# Altium PCB CH641P-R0-1v0.PcbDoc
Units mil, origin at the board's own origin, x right, y up, seen from the top; angles counter-clockwise.
Board outline 1309.24 x 1191.13 mil, 2 copper layers (Top Layer, Bottom Layer); 34 components, 26 nets, 103 pads, 190 vias.
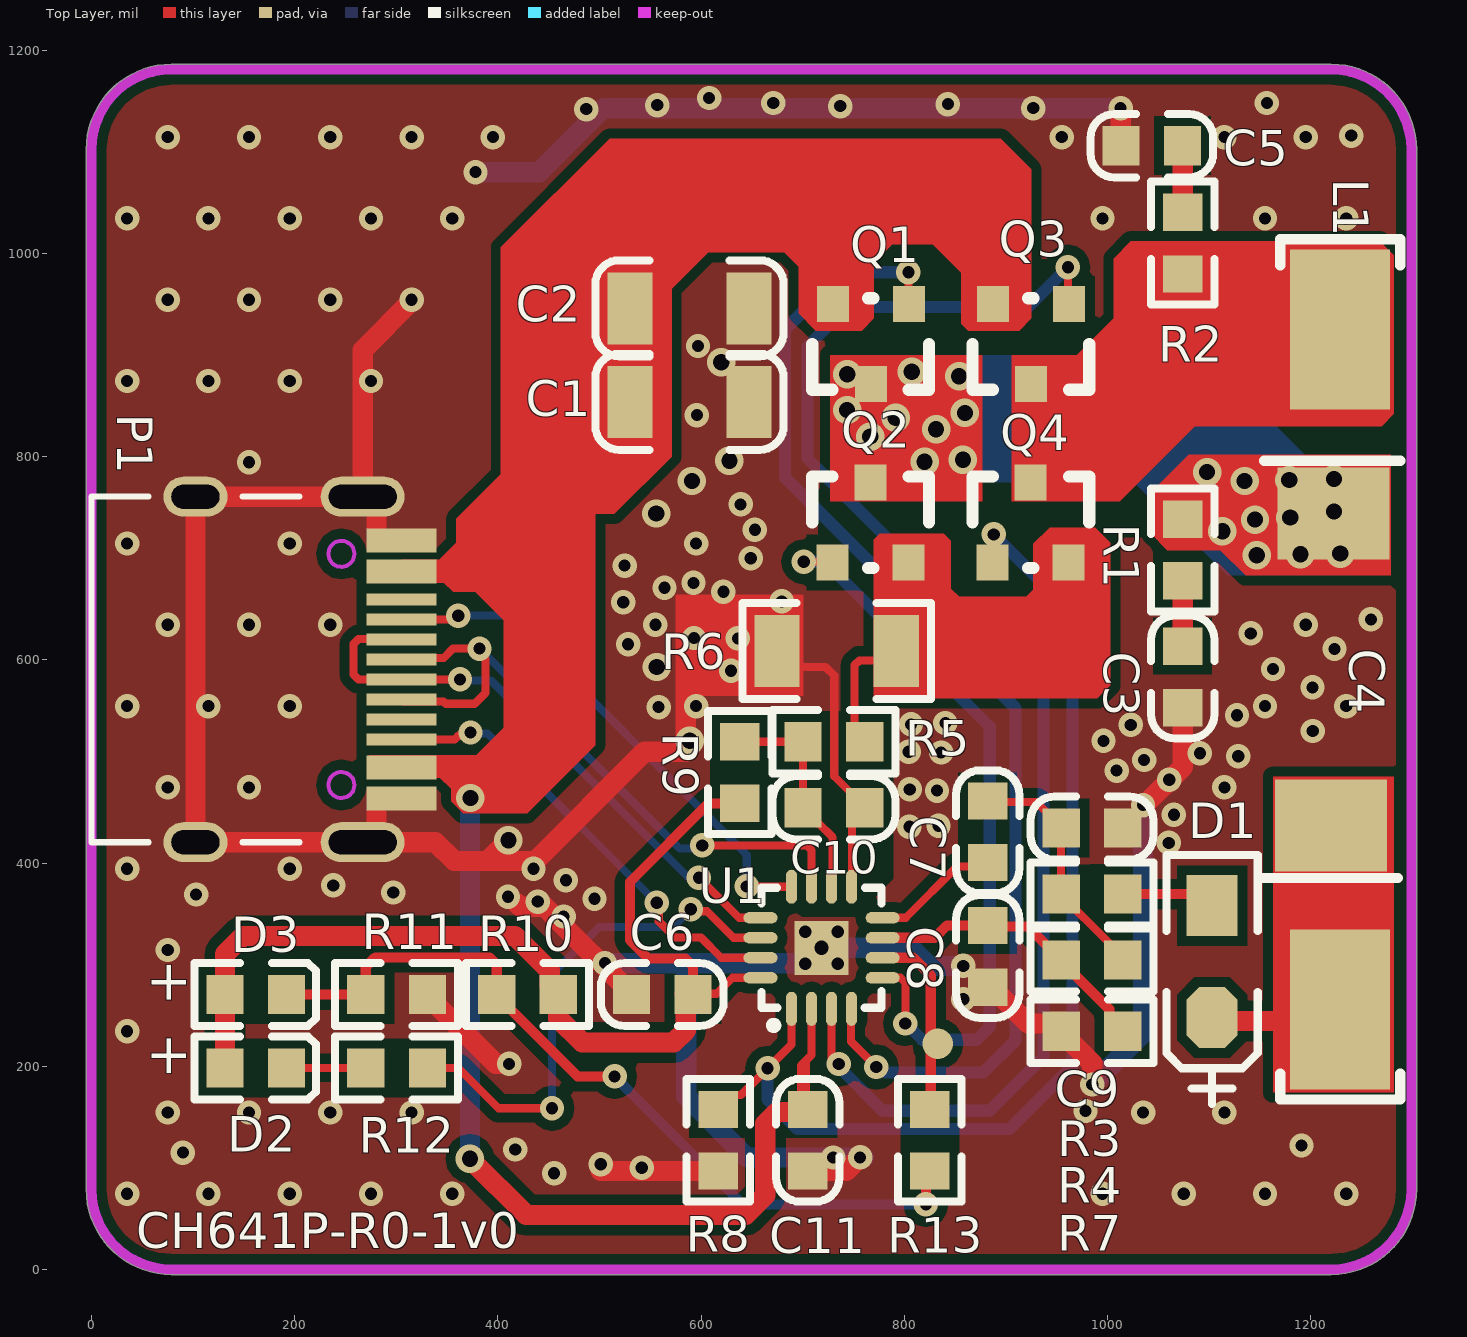
[diagram p0: Top Layer view]
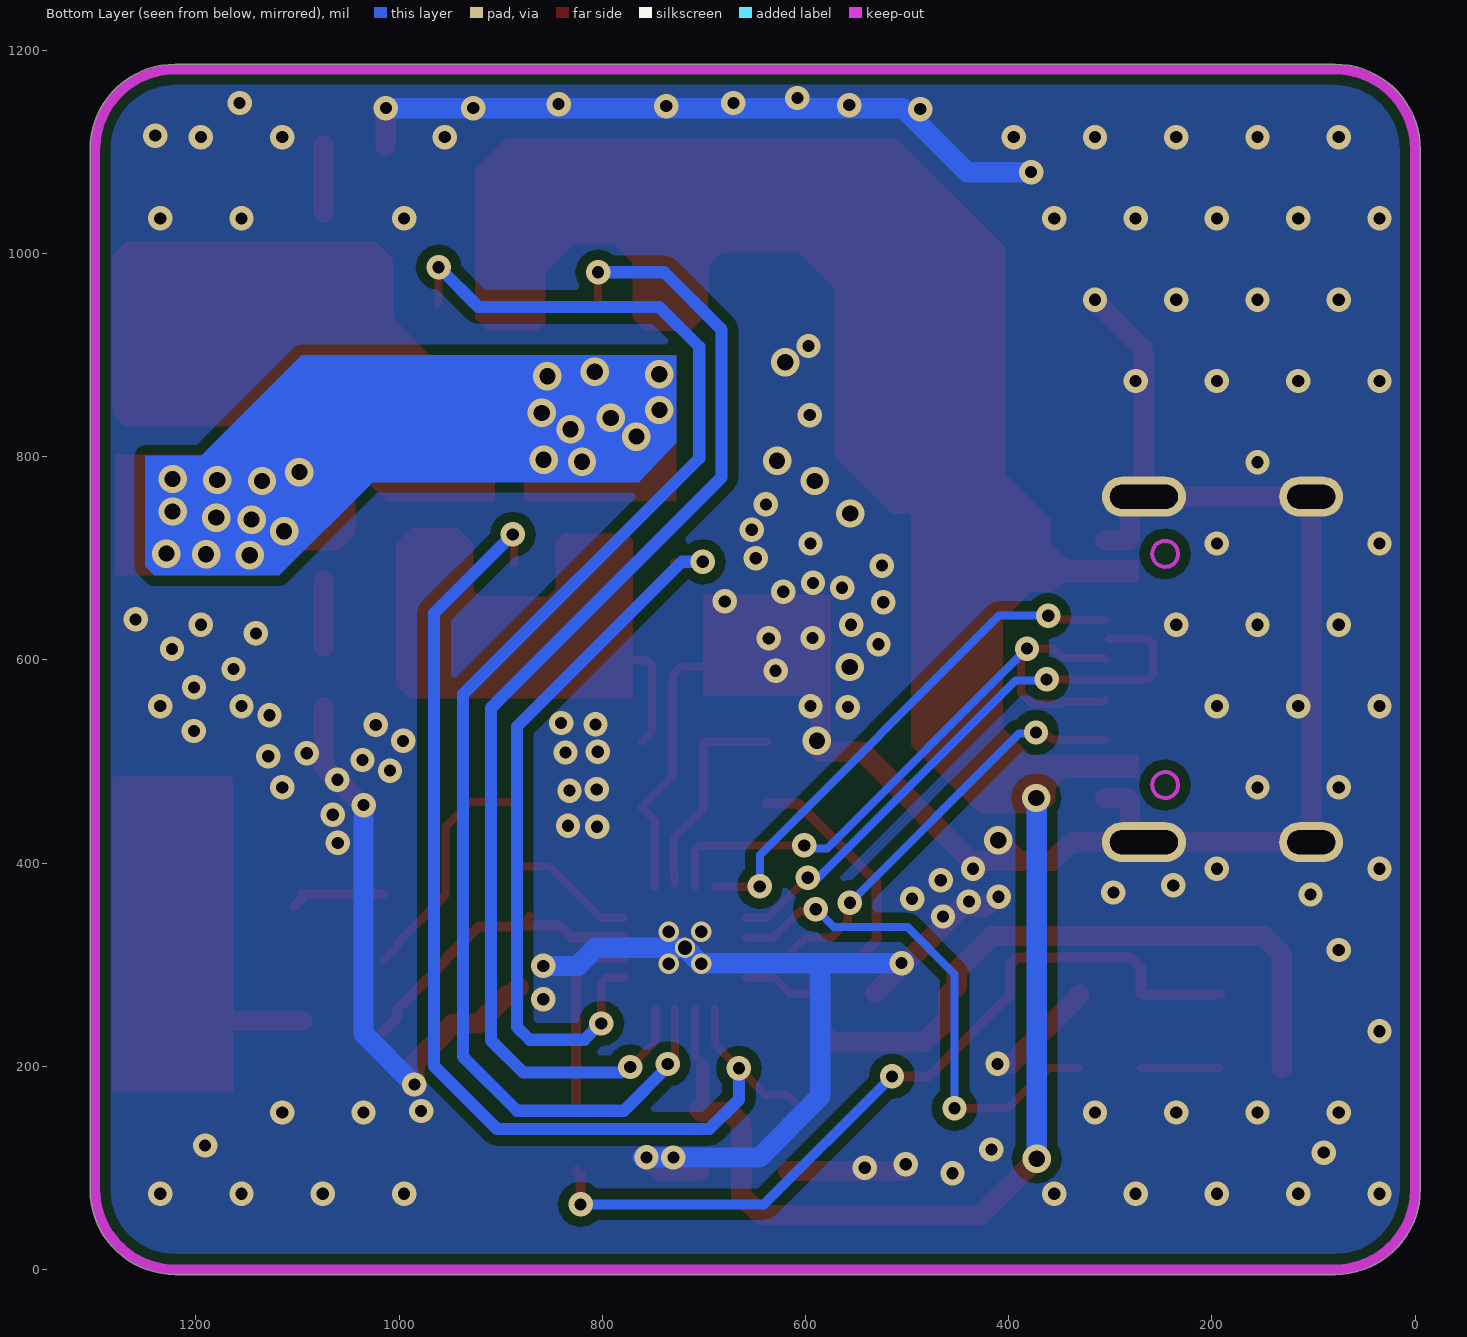
[diagram p1: Bottom Layer view, seen from below]

## Layer stack, top to bottom
Top Solder: solder mask 0.4, Solder Resist, Dk 3.5
Top Layer: signal copper 1.4
Dielectric1: dielectric 12.6, FR-4, Dk 4.8
Bottom Layer: signal copper 1.4
Bottom Solder: solder mask 0.4, Solder Resist, Dk 3.5

## Board outline
-5.02,78.74 cw(c0,78.74) -4.98,79.37 cw(c0,80) -5.02,80 -5.02,1102.36 cw(c78.74,1102.36) 78.74,1186.12 1220.47,1186.12 cw(c1220.47,1102.36) 1304.23,1102.36 cw(c1299.21,1102.36) 1304.23,1102.32 1304.23,78.74 cw(c1220.47,78.74) 1220.47,-5.01 80,-5.01 cw(c80,0) 79.37,-4.98 cw(c78.74,0) 78.74,-5.01 cw(c78.74,78.74)

## Design rules (kind name [scope] priority, off if disabled: settings)
Clearance Clearance_1 [InPolygon] p1: gap=10 ignorepadtopadclearanceinfootprint=FALSE except(0: Arc-Hole Track-Hole SMDPad-Hole THPad-Hole Via-Hole Fill-Hole Poly-Hole Region-Hole Text-Hole)
Clearance [All] p2: gap=6 ignorepadtopadclearanceinfootprint=FALSE except(0: Arc-Hole Track-Hole SMDPad-Hole THPad-Hole Via-Hole Fill-Hole Poly-Hole Region-Hole Text-Hole)
ComponentClearance [All] p1 off: gap=10 collisioncheckmode=3 verticalgap=10 showdistances=FALSE
DiffPairsRouting [All] p1: maxlimit=10 minlimit=7 mostfreqgap=8 toplayer_minwidth=15 toplayer_maxwidth=15 toplayer_prefwidth=15 bottomlayer_minwidth=15 bottomlayer_maxwidth=15 bottomlayer_prefwidth=15 maxuncoupledlength=500
MinimumSolderMaskSliver [All] p1 off: minsoldermaskwidth=10
PolygonConnect [All] p1: connectstyle=Direct reliefconductorwidth=20 reliefentries=4 polygonreliefangle="90 Angle" airgapwidth=10
RoutingVias [All] p1: holewidth=16 width=28 viastyle="Through Hole" minholewidth=12 minwidth=24 maxholewidth=28 maxwidth=50
SilkToSilkClearance [All] p1 off: silktosilkclearance=10
SilkToSolderMaskClearance [IsPad] p1 off: minsilkscreentomaskgap=10 clearancetoexposedcopper=TRUE
SolderMaskExpansion [All] p1: expansion=2 istentingtop=FALSE
Width [All] p1: maxlimit=100 minlimit=6 preferedwidth=10
25 further rules are at their usual default settings.

## Components (designator, comment, footprint, x,y, rotation, side; value= is the part's Value field where it differs from the comment)
C1 "22uF" 1206_C 530,854 r0 top
C2 "22uF" 1206_C 530,946 r0 top
C3 "10nF" 0603_C 1074.12,552.82 r90 top
C4 "400nF CBB 100V" SMD2-2.3x2.8_P7.8mm 1221.27,590.55 r0 top
C5 "10nF" 0603_C 1074,1106 r180 top
C6 "2.2uF" 0603_C 592.13,270.58 r180 top
C7 "3.3nF" 0603_C 882.12,400.45 r90 top
C8 "10nF" 0603_C 882.12,338.45 r270 top
C9 "15nF" 0603_C 954.49,434.45 r0 top
C10 "1uF" 0603_C 700.49,454.45 r0 top
C11 "1uF" 0603_C 705.12,157.45 r270 top
D1 "1N4148" 1206+ 1103,248 r90 top
D2 "LED_R" 0603+ 131.43,198.35 r0 top
D3 "LED_B" 0603+ 131.43,270.58 r0 top
L1 "Coil" SMD2-4x2.5_P17mm 1229.14,925.2 r180 top
P1 "TYPE-C-Receptacle-2.0" TYPE-C-Receptacle-2.0 305.12,590.55 r270 top
Q1 "PMOS 3407" SOT-23 767.1,911.05 r180 top
Q2 "NMOS 3404/3400A" SOT-23 766.9,735.08 r0 top
Q3 "PMOS 3407" SOT-23 924.69,911.05 r180 top
Q4 "NMOS 3404/3400A" SOT-23 924.5,735.08 r0 top
R1 "2R" 0603 1074.12,738.45 r270 top
R2 "2R" 0603 1074.12,1040.43 r270 top
R3 "3K3" 0603 954.49,369.45 r0 top
R4 "33K" 0603 954.49,304.45 r0 top
R5 "1K" 0603 700.49,519.45 r0 top
R6 "0.01R" 1206 674.86,608.45 r0 top
R7 "3K3" 0603 954.49,234.45 r0 top
R8 "NC.(51K)" 0603 617.01,157.45 r270 top
R9 "470K" 0603 638.1,458.75 r90 top
R10 "8K2" 0603 459.51,270.58 r180 top
R11 "NTC104" 0603 330.68,270.58 r180 top
R12 "1K" 0603 270.06,198.35 r0 top
R13 "1K" 0603 825.18,157.45 r270 top
U1 "CH641P" QFN16_3X3 718.62,316.58 r0 top

## Footprints (in the part's own frame and the unit in brackets; to place one, negate y for a bottom-side part, rotate by r counter-clockwise, add the part's x,y. Pads: shape width x height; smd on the part's side, far side on the other; paste and mask are expansions set on the pad)
0603 [mm]
  rect 0.93x0.98 smd: 1(0,0) 2(1.54,0)
  silkscreen extent -0.76,-0.79 2.3,0.79
0603+ [mm]
  rect 0.93x0.98 smd: 1(0,0) 2(1.54,0)
  silkscreen extent -0.76,-0.79 2.27,0.79
0603_C [mm]
  rect 0.93x0.98 smd mask+0.051: 1(0,0) 2(1.54,0)
  silkscreen extent -0.76,-0.79 2.31,0.79
1206 [mm]
  rect 1.13x1.8 smd: 1(0,0) 2(2.98,0)
  silkscreen extent -0.87,-1.2 3.84,1.2
1206+ [mil]
  oct 60x50 smd: 1(0,0)
  rect 60x50 smd: 2(110,0)
  silkscreen extent -85,-45 160,45
1206_C [mm]
  rect 1.13x1.8 smd mask+0.051: 1(0,0) 2(2.98,0)
  silkscreen extent -0.87,-1.2 3.84,1.2
QFN16_3X3 [mm]
  rect 1.35x1.35 smd mask+0.051: 0(0,0)
  round 0.508 hole 0.356: 0(0,0)
  oval 0.28x0.85 smd mask+0.051: 1(-0.75,-1.526) 2(-0.25,-1.526) 3(0.25,-1.526) 4(0.75,-1.526) 9(0.75,1.526) 10(0.25,1.526) 11(-0.25,1.526) 12(-0.75,1.526)
  oval 0.85x0.28 smd mask+0.051: 5(1.526,-0.75) 6(1.526,-0.25) 7(1.526,0.25) 8(1.526,0.75) 13(-1.526,0.75) 14(-1.526,0.25) 15(-1.526,-0.25) 16(-1.526,-0.75)
  silkscreen extent -1.5,-2.02 1.5,1.5, body extent -1.52,-1.52 1.52,1.52, height 0.25
SMD2-2.3x2.8_P7.8mm [mm]
  rect 2.8x2.3 smd: 1(0.029,3.9) 2(-0.029,-3.9)
  silkscreen extent -1.76,-5.22 1.7,5.22
SMD2-4x2.5_P17mm [mm]
  rect 2.5x4 smd: 1(0,0) 2(0,17)
  silkscreen extent -1.5,-2.25 1.5,19.25
SOT-23 [mm]
  rect 0.8x0.9 smd: 1(-0.95,-1) 2(0.95,-1) 3(0,1)
  silkscreen extent -1.46,-1.14 1.46,1.15
TYPE-C-Receptacle-2.0 [mm]
  oval 1x2.1 hole 0.6 slot 1.7 at 90 deg: 0(-4.32,-0.97) 0(4.32,-0.97)
  oval 1x1.6 hole 0.6 slot 1.2 at 90 deg: 0(-4.32,-5.15) 0(4.32,-5.15)
  rect 0.6x1.75 smd mask+0.051: A1(-3.225,0) A4(-2.45,0) B1(3.225,0) B4(2.45,0)
  rect 0.3x1.75 smd mask+0.051: A5(-1.25,0) A6(-0.25,0) A7(0.25,0) A8(1.25,0) B5(1.75,0) B6(0.75,0) B7(-0.75,0) B8(-1.75,0)
  Keep-Out Layer circle w0.1: c2.89,-1.5 r0.325
  Keep-Out Layer circle w0.1: c-2.89,-1.5 r0.325
  silkscreen extent -4.32,-7.75 4.32,-2.55

## Part data
C1 C2 C3 C4 C5 C6 C7 C8 C9 C10 C11: library part CAP, "Capacitor"
D1: library part DIODE, "Diode"
D2 D3: library part LED, "LED"
L1: library part INDUCTOR
P1: "Type-C USB2.0 母座"
Q1 Q3: library part PMOS, "P-MOSFET"
Q2 Q4: library part NMOS, "N-MOSFET"
R1 R2 R3 R4 R5 R6 R7 R8 R9 R10 R11 R12 R13: library part R
U1: "RISC-V MCU with PD/ADC/UART/OA, for wireless charging"

## Free pads (board coordinates)
  round 30 smd mask+2: ""(833.08,222.12)

## Via types
v1: diameter 24, hole 12, Top Layer to Bottom Layer, tented both sides, 156 vias
v2: diameter 28, hole 16, Top Layer to Bottom Layer, tented both sides, 30 vias
v3: diameter 20, hole 12, Top Layer to Bottom Layer, tented both sides, 4 vias

## Nets (pads, with @x,y where several pads share a name; then routed paths per layer and width w, separated by ;. In a path a pad name is that pad's centre, name@x,y a point inside that pad or via, vN(x,y) a via of type N, cw(c..) or ccw(c..) an arc to the next point about the centre after c; other vN are vias at no path point)
CC1: P1.A5 U1.12 | length 514.8
  Top Layer w8: P1.A5 357.43,639.76 v1(361.12,643.45) ; v1(645,377) 644.67,376.67 U1.12
  Bottom Layer w8: v1(361.12,643.45) 409.49,643.45 645,407.94 v1(645,377)
CC2: P1.B5 U1.15 | length 456.4
  Top Layer w8: P1.B5 357.64,521.65 361.37,525.39 v1@373.18,525.39 ; v1(556.38,360.92) 558.45,358.84 558.45,342.62 574.46,326.61 600.05,326.61 619.91,306.74 U1.15
  Bottom Layer w8: v1(373.12,528.45) 374.23,527.34 389.95,527.34 v1(556.38,360.92)
CH1N: Q4.1 R8.1 U1.1 | length 1090.1
  Top Layer w8: R8.1@610.72,164.7 617.77,171.76 639.38,171.76 v1(665.56,197.94) ; v1@664.6,198.89 667.31,201.61 v1@669.23,201.61 ; v1@668.64,202.19 v1@669.23,201.61 ; U1.1 689.09,221.47 v1@669.23,201.61 ; Q4.1 887.1,722.43 v1(888.12,723.45)
  Bottom Layer w12: v1(665.56,197.94) 665.56,167.38 694.67,138.27 903.61,138.27 965.65,200.31 965.65,645.91 v1(888.12,723.45)
CH1P: Q3.1 U1.3 | length 1422.2
  Top Layer w8: U1.3 728.46,208.22 734.52,202.17 v1(735.53,202.17) ; v1(961.12,986.45) 961.12,951.4 Q3.1
  Bottom Layer w12: v1(735.53,202.17) 735.53,199.43 778.7,156.27 883.86,156.27 937.02,209.43 937.02,566.1 704.67,798.45 704.67,908.06 743.93,947.32 921.99,947.32 v1(961.12,986.45)
CH2N: Q2.1 U1.5 | length 733.9
  Top Layer w8: v1(701.12,696.45) 728.76,696.45 Q2.1 ; U1.5 796.4,287.06 801.08,282.37 v1(801.08,242.08)
  Bottom Layer w12: v1(701.12,696.45) 721.73,696.45 884.13,534.05 884.13,238.7 871.47,226.04 817.73,226.04 801.69,242.08 v1(801.08,242.08)
CH2P: Q1.1 U1.4 | length 1189.7
  Top Layer w8: U1.4 747.57,255.92 747.57,224.16 v1(772.52,199.21) ; v1(804.12,981.45) 804.12,950.8 Q1.1
  Bottom Layer w12: v1(772.52,199.21) 775.77,199.21 781.22,193.77 877.86,193.77 909.5,225.41 909.5,552.68 682.77,779.41 682.77,925.2 739.02,981.45 v1(804.12,981.45)
ISN: C1.2 C2.2 C3.1 C5.2 C6.2 C8.2 C9.2 C10.2 C11.2 P1.0 P1.A1 P1.B1 R6.1 R7.1 R8.2 R11.1 U1.0 U1.9 | length 4202.4
  Top Layer w8: R6.1@658.1,593.02 722.55,593.02 731.12,584.45 731.12,485.43 761.12,455.43 C10.2 748.46,441.79 U1.9@748.46,376.22
  Top Layer w20: P1.B1 282.48,463.58 280.67,461.77 280.67,429.42 P1.0@289.62,420.47 ; P1.A1 282.48,717.52 280.67,719.33 280.67,751.68 271.72,760.63 P1.0@266.93,760.63 ; v1@316.45,954.45 266.93,904.93 P1.0@266.93,760.63 ; R11.1 330.68,269.6 398.01,202.28 v1(411.1,202.28) ; v2(410.44,422.46) 389.98,402 383.57,402 ; v1@418.55,360.61 422.32,356.84 439.24,356.84 446.06,356.84 460.12,342.79 484.17,318.73 499.78,303.13 503.78,303.13 v1(505.43,301.48) ; v1(435.12,394.45) 435.88,395.21 435.88,400.98 544.37,509.47 v2@585.12,509.47 ; v1@435.12,402 383.57,402 ; v1@501.28,96.82 R8.2 ; v1@506.68,296.93 506.68,296.39 530.77,272.3 C6.2@531.5,272.3 ; v2@585.12,511 585.12,582.12 ; C11.2 742.86,96.82 756.27,110.23 v1(756.58,110.23) ; C8.2 890.43,269.51 894.49,269.51 922.01,241.99 946.95,241.99 R7.1 954.49,233.46 985,202.95 v1(985,182) ; v1(1013,1143) 1013.18,1142.82 1013.18,1106.18 C5.2 ; v1@1035.84,456.16 1074.12,494.43 C3.1 ; P1.0@266.93,760.63 102.36,760.63 102.36,420.47 266.93,420.47 P1.0@289.62,420.47 ; P1.0@289.62,420.47 338.53,420.47 357,402 383.57,402
  Bottom Layer w20: v1(378,1080) 441,1080 504,1143 v1(927,1143) v1(1013,1143) ; v1(505.43,301.48) 585.39,301.48 ; v1@760.07,110.15 v1(730.07,110.15) 645.45,110.15 585.39,170.21 585.39,301.48 ; v1(858.13,298.73) 824.27,298.73 806.42,316.58 718.62,316.58 703.52,301.48 585.39,301.48 ; v1(985,182) 1035,232 v1(1035,457)
  other v1: 35.12,74.45 115.12,74.45 195.12,74.45 275.12,74.45 355.12,74.45 995.12,74.45 1075.12,74.45 1155.12,74.45 1235.12,74.45 455.38,94.71 541.75,100.11 501.28,103.48 90,115 417.1,118.03 1191,122 75.12,154.45 155.12,154.45 235.12,154.45 315.12,154.45 1035.12,154.45 1115.12,154.45 978.38,155.95 35.12,234.45 858.13,265.95 75.12,314.45 464.71,347.38 439.24,361.99 495.14,364.93 410.01,366.75 103,369 297,371 238,378 467,383 35.12,394.45 195.12,394.45 1060.35,419.78 805.1,435.78 833.78,436.7 1065.4,447.51 832.29,471.26 805.44,472.44 75.12,474.45 155.12,474.45 1115.12,474.45 1060.77,481.96 1009,491 1036.1,501.42 1128.83,505.06 836.27,508.8 1091,508 804.44,509.55 996.09,520.17 1202,530 806.68,536.4 1023,536 840.55,537.82 1127.57,545.39 558.28,553.44 35.12,554.45 115.12,554.45 195.12,554.45 595.12,554.45 1155.12,554.45 1235.12,554.45 1201.86,572.85 629.48,589.32 1163,591 1223.51,610.74 528.2,615.31 593.06,621.5 636.25,621.08 1141,626 75.12,634.45 155.12,634.45 235.12,634.45 555.12,634.45 1195.12,634.45 1259.37,639.83 523.46,656.7 679.44,657.5 622,667 564,671 592.64,675.71 524.81,692.77 649,700 35.12,714.45 195.12,714.45 595.12,714.45 653,728 639,753 155.12,794.45 595.91,840.85 35.12,874.45 115.12,874.45 195.12,874.45 275.12,874.45 597.05,908.87 75.12,954.45 155.12,954.45 235.12,954.45 315.12,954.45 35.12,1034.45 115.12,1034.45 195.12,1034.45 275.12,1034.45 355.12,1034.45 995.12,1034.45 1155.12,1034.45 1235.12,1034.45 75.12,1114.45 155.12,1114.45 235.12,1114.45 315.12,1114.45 395.12,1114.45 955.12,1114.45 1115.12,1114.45 1195.12,1114.45 1240,1116 487,1142 737,1145 557,1146 843,1147 671,1148 1157,1148 608,1153
  other v2: 588.83,520.31 556.37,592.96 556,744 591,776 628,796 620,893
  other v3: 702.67,300.86 734.57,300.86 702.67,332.3 734.57,332.3
ISP: C10.1 R5.1 R9.2 U1.10 | length 216.3
  Top Layer w8: R9.2 700.42,519.38 R5.1 C10.1@700.49,453.46 ; C10.1 C10.1@700.49,453.46 ; U1.10@729.04,379.33 729.04,390.61 729.51,391.07 729.51,425.43 715.78,439.16 714.8,439.16 C10.1@700.49,453.46
LED_R: R12.2 U1.14 | length 514.3
  Top Layer w8: R12.2 361.03,198.35 400.73,158.65 v1(453.36,158.65) ; v1(589.87,354.52) 591.82,352.57 605.86,352.57 632.01,326.43 U1.14
  Bottom Layer w8: v1(453.36,158.65) 453.36,290.47 499.8,336.92 572.27,336.92 v1(589.87,354.52)
NetC3_2: C3.2 R1.2 | length 64.4
  Top Layer w20: C3.2 R1.2
NetC4_1: C4.1 Q1.3 Q2.3 R1.1 | length 764.8
  Top Layer w20: Q2.3 767,774.55 767,824.45 767,871.58 Q1.3 ; R1.1@1072.39,743.45 1165.58,743.45 1177.3,755.16 C4.1@1177.3,758.81 ; v2@1140.12,769.45 1220.12,769.45 1222.42,767.15 C4.1 1212.58,744.09 C4.1@1177.3,708.81
  Bottom Layer w20: v2@767,824.45 1086.55,824.45 v2(1135,776)
  other v2: 1147,703 1190,704 1229.05,704.56 1113.22,726.5 1145.24,738.01 1180,740 1223,746 1179,777 1223,778 1098.12,784.77 820,795 857.81,796.81 766.46,819.73 831.34,826.83 791.64,838.13 859.74,842.97 743.77,845.91 854,879 744,881 807.45,883.64
NetC4_2: C4.2 D1.1 L1.2 | length 323.6
  Top Layer w20: D1.1@1095.12,244.45 1217.68,244.45 L1.2 1220.12,264.93 C4.2
NetC5_1: C5.1 R2.1 | length 65.6
  Top Layer w20: C5.1 1074.06,1105.94 1074.06,1040.49 R2.1
NetC7_2: C7.2 C9.1 R3.1 R4.2 | length 239.1
  Top Layer w8: C7.2 883.24,459.96 929.96,459.96 954.49,435.43 R3.1 954.49,368.46 1000.81,322.14 1000.81,318.76 R4.2
NetD1_2: D1.2 R3.2 | length 91.1
  Top Layer w10: R3.2 D1.2@1095.12,369.45 ; D1.2@1095.12,365.88 D1.2
NetD2_2: D2.2 R12.1 | length 78
  Top Layer w8: D2.2 R12.1
NetD3_2: D3.2 R10.2 R11.2 R13.2 | length 815.1
  Top Layer w10: D3.2 R11.2 270.05,297.68 279.5,307.12 391.76,307.12 398.88,300 R10.2 398.88,269.6 478.52,189.96 v1(514.9,189.96) ; v1(821.37,64) 821.37,93 R13.2
  Bottom Layer w10: v1(514.9,189.96) 514.9,186.85 518.01,186.85 640.87,64 v1(821.37,64)
NetL1_1: L1.1 Q3.3 Q4.3 R2.2 | length 551.7
  Top Layer w20: Q4.3 924.6,774.55 924.6,871.58 Q3.3 1033.68,871.68 1068.46,906.46 1076,906.46 ; R2.2 1074.12,969.8 1076,977.92 1076,906.46 ; L1.1@1189.93,856.46 1229.14,895.67 L1.1 ; L1.1@1189.93,906.46 1076,906.46
NetQ2_2: Q2.2 Q4.2 R5.2 R6.2 | length 330.9
  Top Layer w8: R5.2 751.12,529.45 751.12,594.76 755.8,599.45 R6.2@792.18,599.45
  Top Layer w20: Q2.2 804.3,693.74 848.59,649.45 935.12,649.45 956.15,670.48 956.15,689.96 Q4.2
NTC/LED_B: pad. R13.1 U1.6 | length 187.1
  Top Layer w10: U1.6 808.74,306.74 826.08,289.4 R13.1@826.08,156.84
QII: C7.1 U1.8 | length 125.9
  Top Layer w8: U1.8 801.54,346.11 852.08,396.66 878.33,396.66 C7.1
UDM: P1.A7 P1.B7 U1.13 | length 576.4
  Top Layer w8: P1.B7@301.12,620.45 262.8,620.45 258.12,615.76 258.12,585.39 262.8,580.71 P1.A7 v1(362.72,580.71) ; v1(597.91,385.49) 637.29,346.11 U1.13
  Bottom Layer w8: v1(362.72,580.71) 363.9,579.52 393.48,579.52 589.39,383.61 596.02,383.61 v1(597.91,385.49)
UDP: P1.A6 P1.B6 U1.11 | length 663.8
  Top Layer w8: P1.B6 307.02,559.12 346.45,559.12 348.86,556.71 377.18,556.71 388,567.53 388,600.67 382,606.67 v1(382,611) 356,611 346.82,601.82 306.54,601.82 P1.A6 ; v1(601.29,417.31) 704.09,417.31 708.78,412.63 U1.11
  Bottom Layer w8: v1(382,611) 578.66,414.34 598.31,414.34 v1(601.29,417.31)
VBUS: C1.1 C2.1 C11.1 P1.A4 P1.B4 Q1.2 Q3.2 U1.2 | length 1564.6
  Top Layer w8: C11.1@703.23,162.38 703.23,204.36 ; C11.1 698.35,164.22 698.35,200.56 708.78,211 U1.2
  Top Layer w20: P1.B4 305.47,494.45 383,494.45 ; P1.A4 306.93,688.82 444.12,688.82 ; v2(372.53,108.84) 427.79,53.59 643.97,53.59 663.28,72.9 663.28,143.26 675,154.97 702.64,154.97 C11.1 ; v2@378,467 378.77,467.77 378.77,490.21 383,494.45 ; 480.12,688.82 444.12,688.82 ; 850.12,1024.45 887.29,987.27 Q3.2 ; 383,494.45 432.4,494.45 444.12,506.16 444.12,688.82
  Bottom Layer w20: v2(372.53,108.84) 372.53,463.53 v2(373,464)
VDD5: C6.1 D2.1 D3.1 R9.1 R10.1 U1.16 | length 1083.5
  Top Layer w8: C6.1@592.13,285.54 577.89,271.3 584.94,271.3 592.13,271.3 615.08,271.3 630.84,287.06 U1.16
  Top Layer w10: C6.1@592.13,272.3 592.13,285.54 592.13,298.41 584.54,306.01 548.12,306.01 530.02,324.12 530.02,381.4 607.36,458.75 R9.1
  Top Layer w20: D2.1 D3.1 131.43,310.42 149.13,328.12 416.93,328.12 451.21,293.85 451.21,278.89 R10.1 459.51,246.98 483.08,223.41 573.23,223.41 584.94,235.12 C6.1@584.94,271.3
VOSC: C8.1 R4.1 R7.2 U1.7 | length 305.2
  Top Layer w8: C8.1@871.49,348.08 881.12,338.45 C8.1@882.12,337.45
  Top Layer w10: U1.7 829.93,326.43 841.95,338.45 881.12,338.45 C8.1 ; C8.1@882.12,337.45 921.49,337.45 940.2,318.74 941.18,318.74 954.49,305.43 R4.1 954.49,303.46 1001.81,256.14 1001.81,247.76 R7.2
pads on no net: P1.A8 P1.B8

## Polygon pours and split planes (outlines as drawn)
ISN on Bottom Layer "GND" (solid, remove dead copper, pour order 1): 78.74,1181.1 1220.47,1181.1 cw(c1220.47,1102.36) 1299.21,1102.36 1299.21,78.74 cw(c1220.47,78.74) 1220.47,0 80,0 cw(c80,80) 0,80 0,1102.36 cw(c78.74,1102.36)
ISN on Top Layer "GND" (solid, remove dead copper, pour order 0): 78.74,1181.1 1220.47,1181.1 cw(c1220.47,1102.36) 1299.21,1102.36 1299.21,78.74 cw(c1220.47,78.74) 1220.47,0 80,0 cw(c80,80) 0,80 0,1102.36 cw(c78.74,1102.36)

## Keep-outs
Keep-Out Layer:
  lines w10: 0,78.74 ccw(c78.74,78.74) 78.74,0 1220.47,0 ccw(c1220.47,78.74) 1299.21,78.74 1299.21,1102.36 ccw(c1220.47,1102.36) 1220.47,1181.1 78.74,1181.1 ccw(c78.74,1102.36) 0,1102.36 0,78.74

## Other copper
Top Layer:
  rectangle net NetC4_2: 1163,174 1282,485
  rectangle net NetC4_1: 727,756 877,900
  rectangle net ISN: 575.12,564.45 700.96,664.45
  pour cut-out: 715,767 715,719.98 1043.02,719.98 1043.02,765.02
  region net VBUS: 403,741.06 403,1006 510,1113 895,1113 925,1083 925,936 913,924 863,924 856,931 856,981 828,1009 788,1009 770,991 770,936 758,924 713,924 696,941 696,987 682,1001 607,1001 571,965 571,800 514.75,743.75
  region: 359,740
  region net NetC4_1: 1279,683 1136,683 1111,708 1058.9,708 1043.02,723.88 1043.02,765.02 1080,802 1279,802
  region net VBUS: 272,484 343,484 354,473 354,461 366,449 428.83,449 495.84,516.01 495.84,797 417,797 359,739 359,715 342,698 273,698 272,697 272,679 275,676 347,676 356,667 378,667 406,639 406,533 379,506 273,506 272,505
  region net NetL1_1: 906,756 1012,756 1086,830 1270,830 1282,842 1282,998 1268,1012 1023,1012 1006,995 1006,936 970,900 906,900
  region net NetQ2_2: 770,562 990,562 1003,575 1003,715 988,730 943,730 927,714 927,669 920,662 854,662 846,670 846,717 839,724 776,724 770,718 770,675
  pour cut-out: 698.6,550 698.6,346.85 752.24,346.85 789.73,384.33 789.73,550
Bottom Layer:
  region net NetC4_1: 727.4,900 1096,900 1195,801 1250,801 1250,692 1241,683 1118,683 1026,775 764,775 727.4,813.86

## Silkscreen, mask and mechanical layers (free items; w line width, h text height)
Top Overlay:
  text "CH641P-R0-1v0" at 44,21 h35
Mechanical 1:
  lines w10: 0,78.74 ccw(c78.74,78.74) 78.74,0 ; 0,80 0,1102.36 cw(c78.74,1102.36) 78.74,1181.1 1220.47,1181.1 cw(c1220.47,1102.36) 1299.21,1102.36 1299.21,78.74 cw(c1220.47,78.74) 1220.47,0 80,0

## Text inside footprints (layer, text, board x,y; h text height)
D2: Top Overlay "+" at 93.35,187.36 h40 r90
D3: Top Overlay "+" at 93.35,259.59 h40 r90